# Altium PCB PCB1.PcbDoc
Units mm, origin at the board's own origin, x right, y up, seen from the top; angles counter-clockwise.
Board outline 91.01 x 104.94 mm, 2 copper layers (Top Layer, Bottom Layer); 47 components, 38 nets, 158 pads, 28 vias.
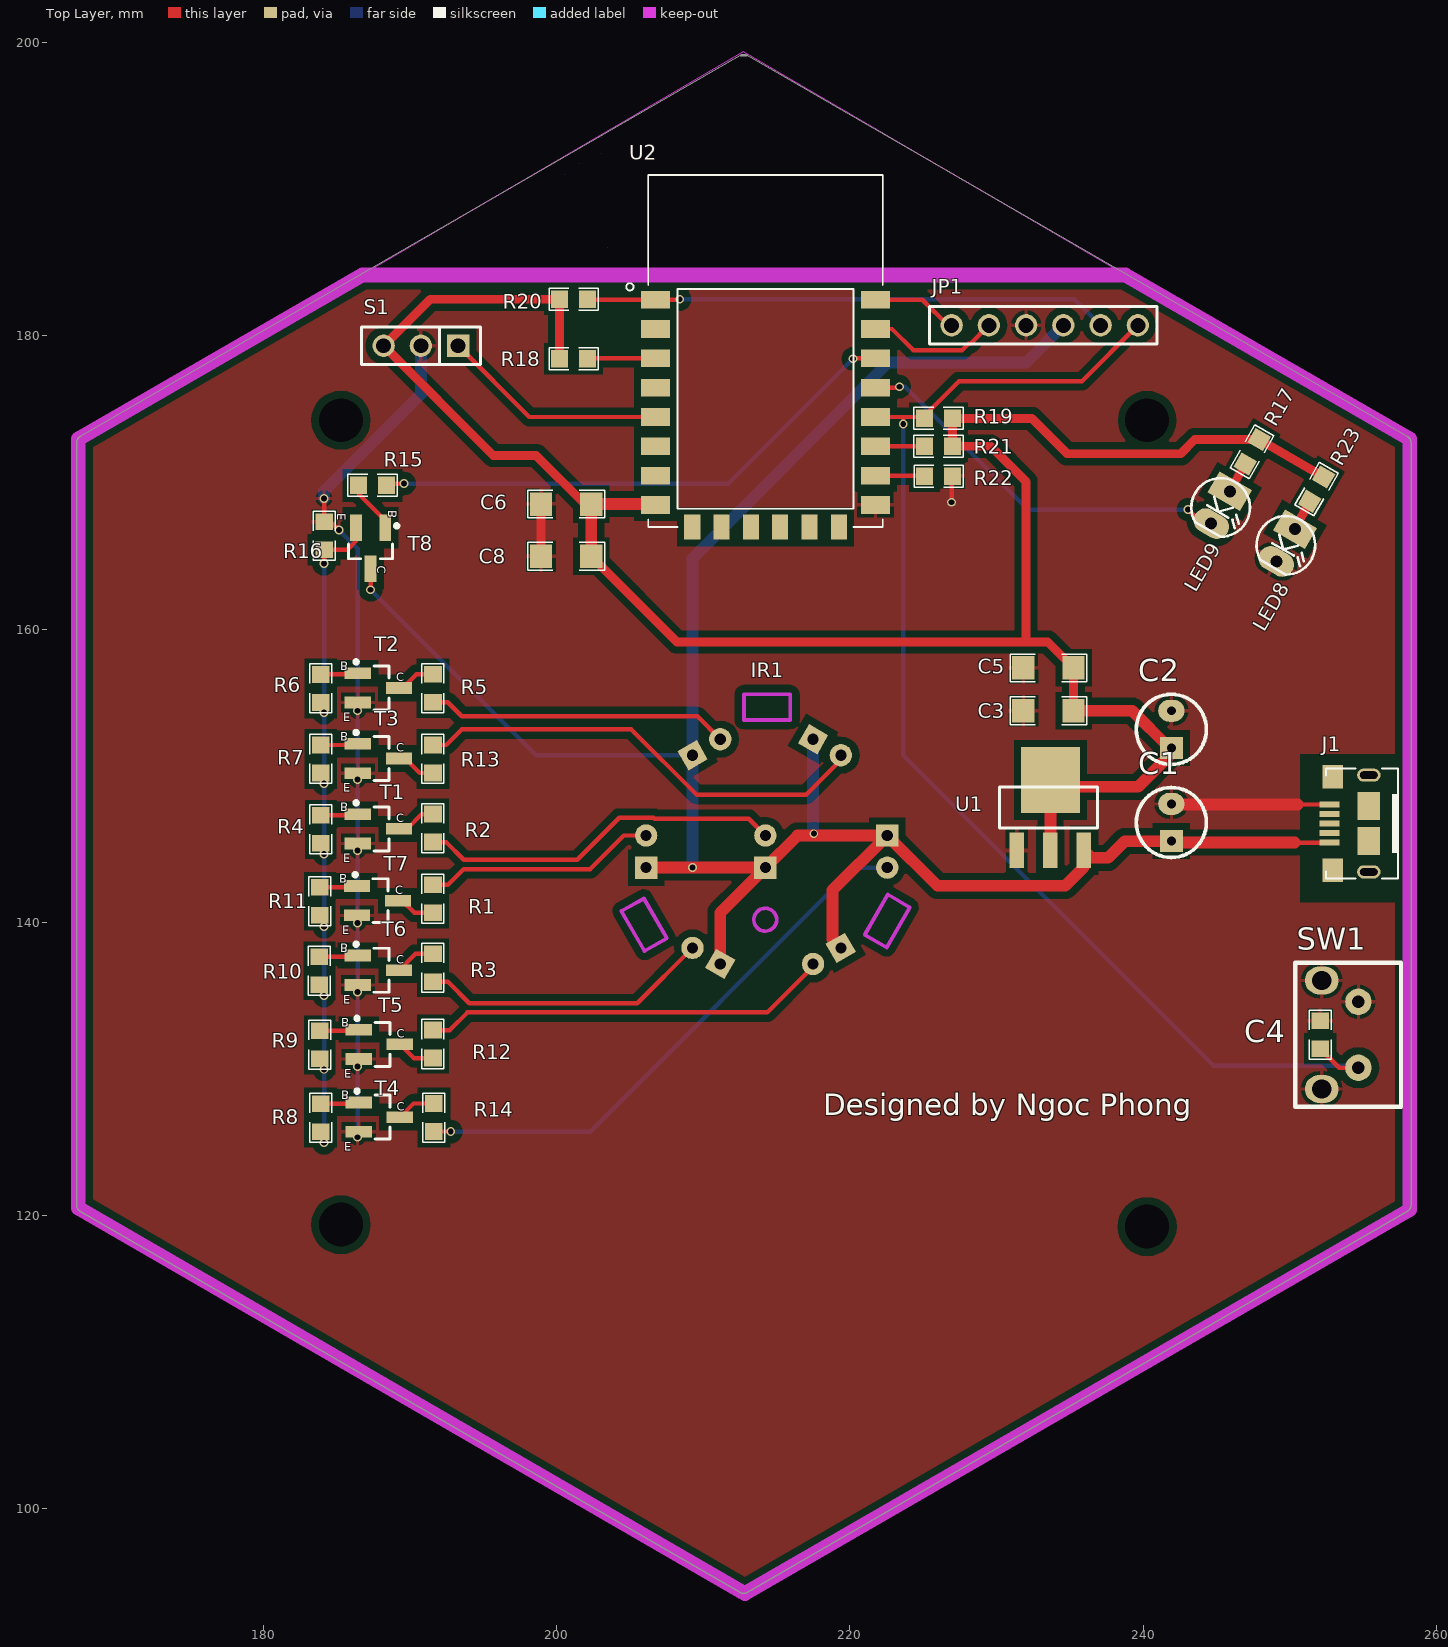
[diagram p0: Top Layer view]
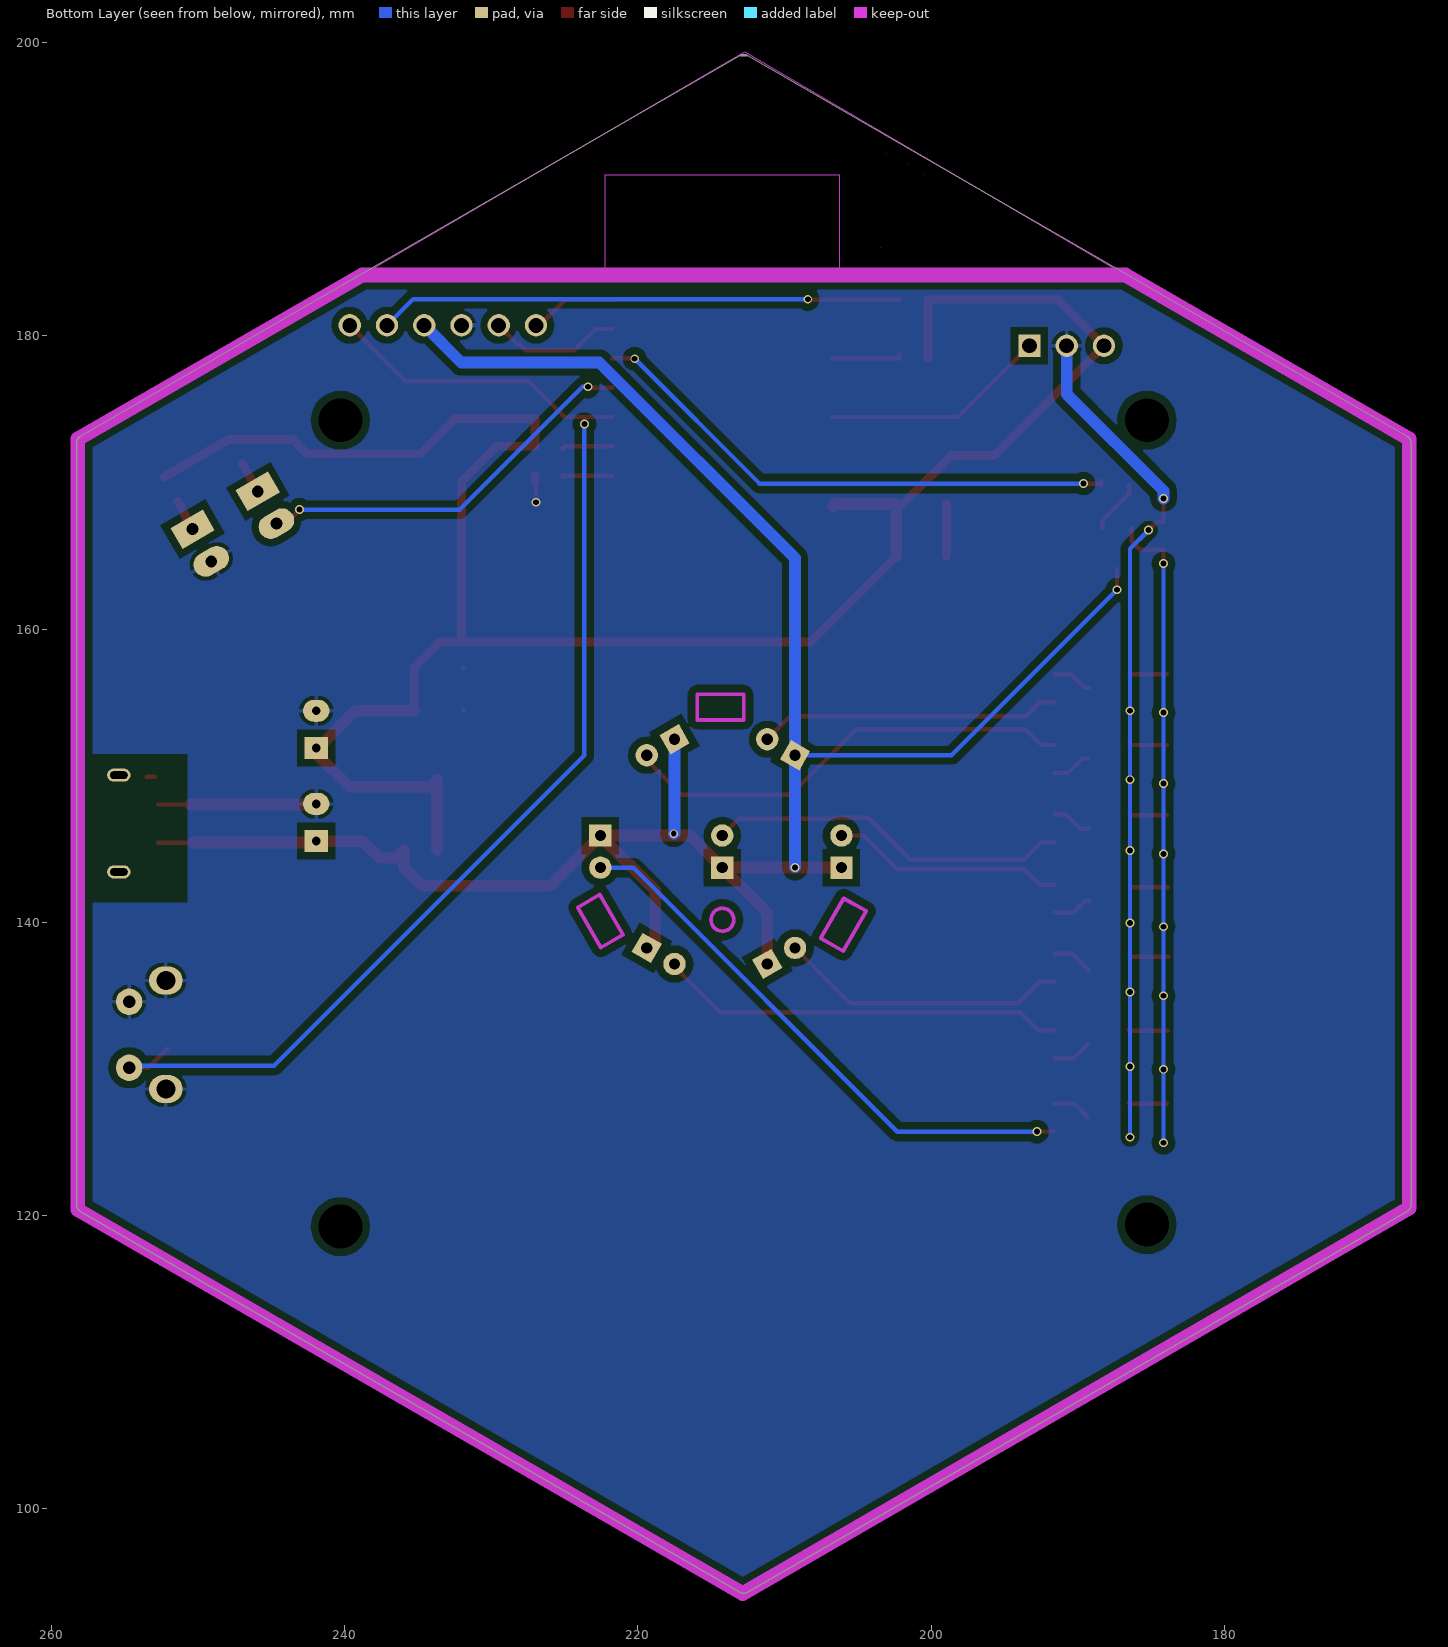
[diagram p1: Bottom Layer view, seen from below]
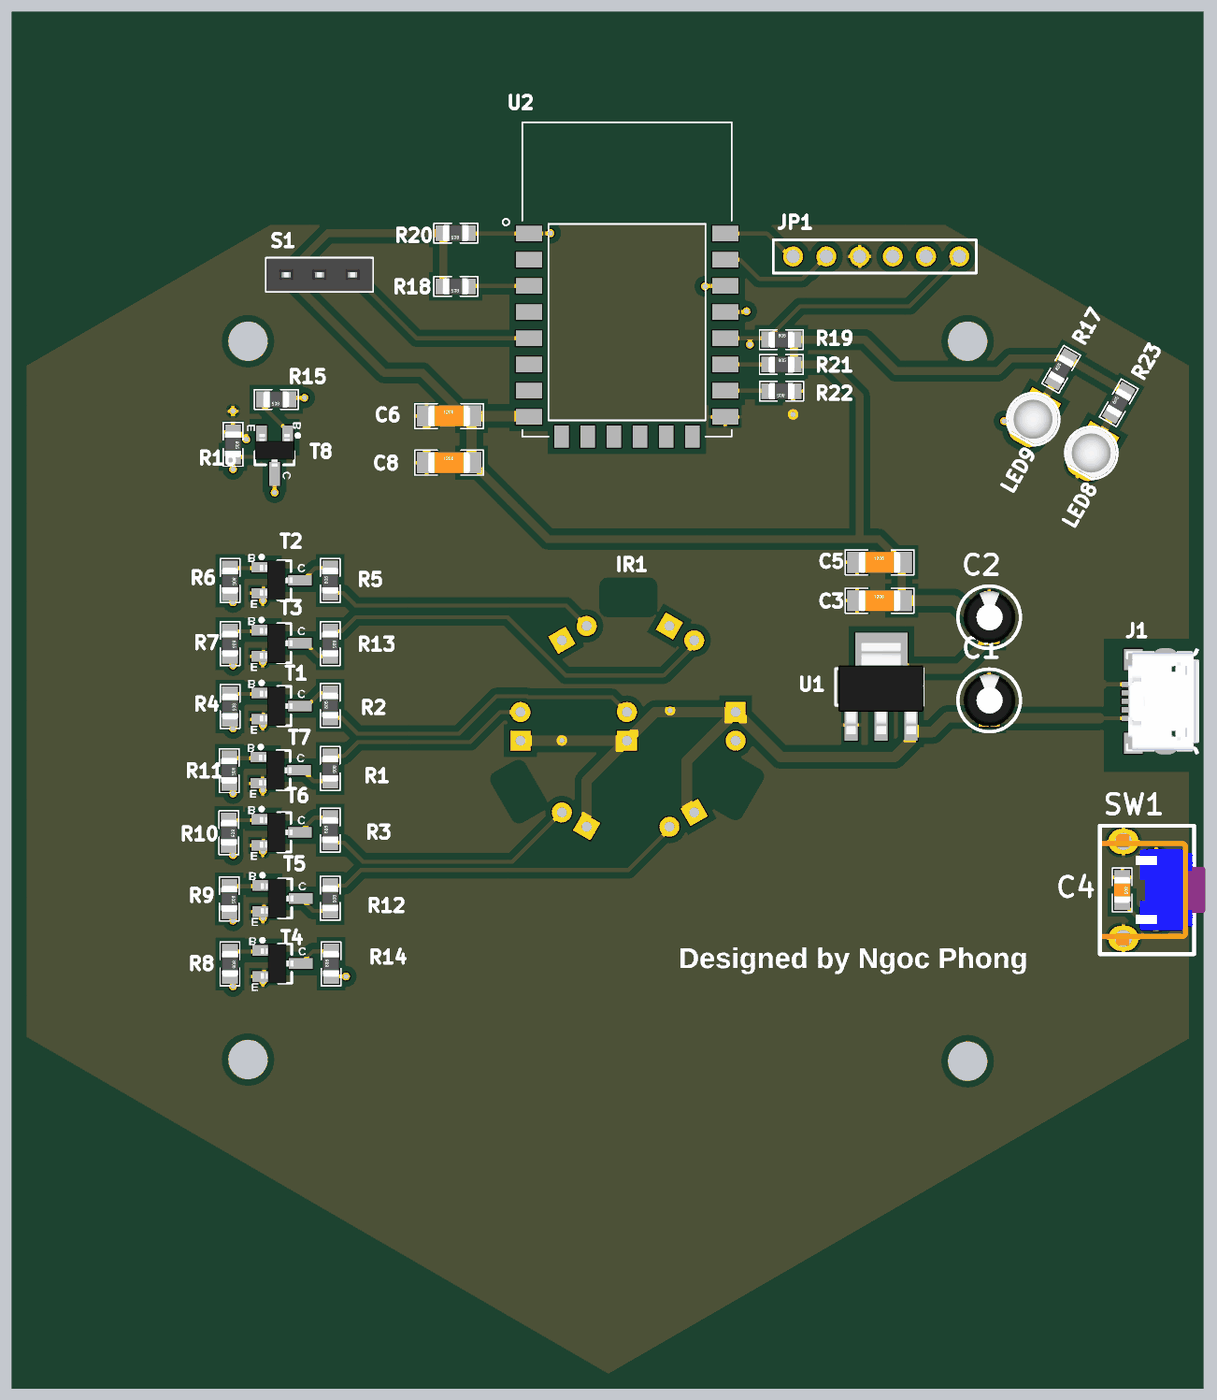
[diagram p2: 3D render of the assembled board from above, using the file's embedded part models]

## Layer stack, top to bottom
Top Solder: solder mask 0.0102, Solder Resist, Dk 3.5
Top Layer: signal copper 0.0356
Dielectric 1: dielectric 0.32, FR-4, Dk 4.8
Bottom Layer: signal copper 0.0356
Bottom Solder: solder mask 0.0102, Solder Resist, Dk 3.5

## Board outline
190.023,107.305 190.024,107.305 212.524,94.313 ccw(c212.775,94.746) 213.025,94.313 213.026,94.313 235.527,107.305 ccw(c235.278,107.738) 235.528,107.305 258.03,120.298 ccw(c257.78,120.731) 258.281,120.731 258.281,172.701 ccw(c257.78,172.701) 258.03,173.134 235.528,186.127 ccw(c235.278,185.693) 235.527,186.127 235.528,186.127 235.527,186.127 213.026,199.119 213.025,199.119 ccw(c212.775,198.686) 212.524,199.119 212.525,199.119 cw(c212.775,198.686) 213.026,199.119 212.524,199.119 190.024,186.127 ccw(c190.273,185.693) 190.023,186.127 167.52,173.134 ccw(c167.77,172.701) 167.27,172.701 167.27,120.731 ccw(c167.77,120.731) 167.52,120.298
cut-out: 186.748,184.15 238.802,184.15 212.725,199.39
cut-out: 203.073,193.548
cut-out: 201.549,191.77
cut-out: 200.533,191.008
cut-out: 203.073,192.405
cut-out: 203.454,186.055

## Design rules (kind name [scope] priority, off if disabled: settings)
Clearance [All] p1: gap=0.5 ignorepadtopadclearanceinfootprint=FALSE
PolygonConnect [All] p1: connectstyle=Relief reliefconductorwidth=0.254 reliefentries=4 polygonreliefangle="90 Angle" airgapwidth=0.254
RoutingVias [All] p1: holewidth=0.4 width=0.6 viastyle="Through Hole" minholewidth=0.4 minwidth=0.6 maxholewidth=0.4 maxwidth=0.6
SolderMaskExpansion [All] p1: expansion=0.102
Width [All] p1: maxlimit=0.8 minlimit=0.3 preferedwidth=0.6
30 further rules are at their usual default settings.

## Components (designator, comment, footprint, x,y, rotation, side; value= is the part's Value field where it differs from the comment)
C1 "100uF/25v" CA-ALU-2.54 241.935,146.812 r90 top value=104
C2 "100uF/25v" CA-ALU-2.54 241.935,153.162 r90 top value=104
C3 "103/1206" SM-Cap-1206 233.553,154.432 r0 top
C4 "104/0805" SM-CAP-0805 252.095,132.334 r270 top
C5 "106/1206" SM-Cap-1206 233.553,157.353 r0 top
C6 "104/1206" SM-Cap-1206 200.66,168.529 r0 top
C8 "106/1206" SM-Cap-1206 200.66,164.973 r0 top
IR1 "IR_HUNONIC" PCBComponent_1 240.329,136.804 r0 top
J1 "=value" "USB-Micro-B-RA-SMD-PiP - duplicate" 252.722,146.742 r180 top
JP1 "Programming UART 6Pin" "JP6 2.54 No3D" 226.949,180.721 r0 top
LED8 "LED_3mm" LED-3 249.73,165.716 r240 top
LED9 "LED_3mm" LED-3 245.285,168.291 r240 top
R1 "221/0805" SM-RES-0805 191.578,141.605 r270 top
R2 "221/0805" SM-RES-0805 191.578,146.431 r90 top
R3 "221/0805" SM-RES-0805 191.578,136.906 r90 top
R4 "471/0805" SM-RES-0805 183.92,146.343 r270 top
R5 "221/0805" SM-RES-0805 191.578,155.966 r90 top
R6 "471/0805" SM-RES-0805 183.92,155.956 r270 top
R7 "471/0805" SM-RES-0805 183.92,151.143 r270 top
R8 "471/0805" SM-RES-0805 183.915,126.683 r270 top
R9 "471/0805" SM-RES-0805 183.863,131.649 r270 top
R10 "471/0805" SM-RES-0805 183.831,136.704 r270 top
R11 "471/0805" SM-RES-0805 183.855,141.444 r270 top
R12 "221/0805" SM-RES-0805 191.578,131.699 r270 top
R13 "221/0805" SM-RES-0805 191.578,151.143 r270 top
R14 "221/0805" SM-RES-0805 191.64,126.693 r90 top
R15 "470/0805" SM-RES-0805 187.452,169.799 r180 top
R16 "10k/0805" SM-RES-0805 184.15,166.37 r270 top
R17 "10K/0805" SM-RES-0805 247.444,172.101 r60 top
R18 "10K/0805" SM-RES-0805 201.168,178.435 r180 top
R19 "10K/0805" SM-RES-0805 226.06,174.371 r0 top
R20 "10K/0805" SM-RES-0805 201.168,182.499 r180 top
R21 "10K/0805" SM-RES-0805 226.06,172.466 r0 top
R22 "10K/0805" SM-RES-0805 226.06,170.434 r180 top
R23 "=Value" SM-RES-0805 251.841,169.545 r60 top
S1 "IR" JP3-C1T 193.294,179.324 r180 top
SW1 "SW2" Button-inclined-2C 253.492,132.334 r90 top
T1 "C1815" "c1815 dan" 187.26,146.377 r0 top
T2 "C1815" "c1815 dan" 187.26,155.99 r0 top
T3 "C1815" "c1815 dan" 187.26,151.177 r0 top
T4 "C1815" "c1815 dan" 187.322,126.717 r0 top
T5 "C1815" "c1815 dan" 187.322,131.683 r0 top
T6 "C1815" "c1815 dan" 187.26,136.737 r0 top
T7 "C1815" "c1815 dan" 187.195,141.478 r0 top
T8 "C1815" "c1815 dan" 187.325,166.116 r270 top
U1 "AMS1117-5V/3.3V" SOT-223 233.68,147.32 r0 top
U2 "ESP8266-12E/ESP-12E" XCVR_ESP8266-12E/ESP-12E 214.256,175.467 r0 top

## Footprints (in the part's own frame and the unit in brackets; to place one, negate y for a bottom-side part, rotate by r counter-clockwise, add the part's x,y. Pads: shape width x height; smd on the part's side, far side on the other; paste and mask are expansions set on the pad)
Button-inclined-2C [mm]
  oval 1.9x2.3 hole 1.3: 0(-3.7,1.3) 0(3.7,1.3)
  round 1.8 hole 0.85: 1(2.25,-1.2) 2(-2.25,-1.2)
  silkscreen extent -4.9,-4.1 4.9,3.1, body extent -4.25,-4.95 4.25,2.95, height 7.4
"c1815 dan" [mm] "SOT23, 3-Leads, Body 3.0x2.6mm (max), Pitch 0.95mm, IPC Medium Density (SOT95P245X110-3N)"
  rect 1.8x0.8 smd: 1(-0.8,-1) 2(2,0) 3(-0.8,1)
  silkscreen extent -1.05,-1.5 1.32,1.9, body extent -1.05,-1.5 1.45,1.5, height 1.06
CA-ALU-2.54 [mm]
  rect 1.5x1.58 hole 0.6: 1(-1.27,0)
  oval 1.5x1.8 hole 0.6: 2(1.27,0)
  silkscreen extent -2.39,-2.39 2.39,2.39, body extent -2,-2.03 1.99,1.97, height 7.01
JP3-C1T [mm] "3 row, straight, gold plating"
  rect 1.52x1.52 hole 1.02: 1(0,0)
  round 1.52 hole 1.02: 2(2.54,0) 3(5.08,0)
  silkscreen extent -1.52,-1.27 6.6,1.27, body extent -1.52,-1.25 6.6,1.25, height 8.51
"JP6 2.54 No3D" [mm]
  round 1.52 hole 1.02: 1(0,0) 2(2.54,0) 3(5.08,0) 4(7.62,0) 5(10.16,0) 6(12.7,0)
  silkscreen extent -1.52,-1.27 14,1.27
LED-3 [mil] "LED 2 PIN, 3ly Only colour"
  rect 65x100 hole 32: 1(-50,0)
  oval 65x100 hole 32: 2(50,0)
  silkscreen extent -79,-78 68,79, body extent -75,-75 63,75, height 217
PCBComponent_1 [mil]
  rect 60x60 hole 30: 1(-1026.77,272.88) 7(-699.72,359.01) 13(-1346.94,272.89)
  round 60 hole 30: 2(-1026.77,359.02) 4(-1147.83,617.74) 6(-824.22,574.67) 8(-699.72,272.87) 10(-898.83,14.15) 12(-1222.44,57.23) 14(-1346.94,359.03)
  rect 60x60 hole 30 rot 30: 3(-1222.42,574.68) 9(-824.23,57.22)
  rect 60x60 hole 30 rot 150: 5(-898.81,617.74) 11(-1147.84,14.16)
  Keep-Out Layer circle w10: c-1027.26,132.96 r30.61
  Keep-Out Layer lines w10: -1413.67,156.57 -1352.67,189.61 -1291.42,83.52 ; -1413.67,156.57 -1353.27,190.65 -1291.42,83.52 ; -1413.67,156.57 -1351.48,48.85 ; -1413.67,156.57 -1351.48,48.85 ; -1351.48,48.85 -1291.42,83.52 ; -1351.48,48.85 -1291.42,83.52 ; -1084.48,669.01 -960.78,669.01 -960.09,669.7 -960.09,718.99 -960.09,738.36 -1084.48,738.36 -1084.48,669.01 ; -760.26,92.72 -700.97,58.49 -639.12,165.62 -698.07,200.43 -760.26,92.72
  body extent -812,-176 -812,-176, height 10
SM-CAP-0805 [mm]
  rect 1.14x1.2 smd: 1(-0.955,0) 2(0.955,0)
  silkscreen extent -1.68,-0.75 1.67,0.75, body extent -1,-0.62 1,0.63, height 0.8
SM-Cap-1206 [mm]
  rect 1.52x1.6 smd: 1(-1.71,0) 2(1.71,0)
  silkscreen extent -2.62,-0.95 2.62,0.95, body extent -1.6,-0.8 1.6,0.8, height 1.02
SM-RES-0805 [mm]
  rect 1.14x1.2 smd: 1(-0.955,0) 2(0.955,0)
  silkscreen extent -1.68,-0.75 1.67,0.75, body extent -1,-0.62 1,0.63, height 0.8
SOT-223 [mm] "SOT-223"
  rect 1x2.4 smd: 1(-2.286,-2.4) 2(0,-2.4) 3(2.286,-2.4)
  rect 4x4.5 smd: 4(0.014,2.4)
  silkscreen extent -3.48,-0.88 3.22,1.92, body extent -3.25,-3.09 3.25,3.87, height 1.66
"USB-Micro-B-RA-SMD-PiP - duplicate" [mm]
  rect 1.35x0.4 smd: 1(0,1.3) 2(0,0.65) 3(0,0) 4(0,-0.65) 5(0,-1.3)
  oval 1.6x0.9 hole 0.5 slot 1.2 at 0 deg: 6(-2.675,3.3) 6(-2.675,-3.3)
  oval 2x1.5 on Top Paste: 6(-2.675,3.3) 6(-2.675,-3.3)
  rect 1.55x1.9 smd: 6(-2.675,-1.2) 6(-2.675,1.2)
  rect 1.4x1.6 smd: 6(-0.225,3.2) 6(-0.225,-3.2)
  silkscreen extent -4.75,-3.75 0.25,3.75, body extent -5.28,-4.1 0.15,4.1, height 2.72
XCVR_ESP8266-12E/ESP-12E [mm]
  rect 2x1.2 smd: 1(-7.5,7) 2(-7.5,5) 3(-7.5,3) 4(-7.5,1) 5(-7.5,-1) 6(-7.5,-3) 7(-7.5,-5) 8(-7.5,-7) 15(7.5,-7) 16(7.5,-5) 17(7.5,-3) 18(7.5,-1) 19(7.5,1) 20(7.5,3) 21(7.5,5) 22(7.5,7)
  rect 1.1x1.7 smd: 9(-5,-8.5) 10(-3,-8.5) 11(-1,-8.5) 12(1,-8.5) 13(3,-8.5) 14(5,-8.5)
  Keep-Out Layer region: 8,8.51 -8.009,8.51 -8.009,15.5 8,15.5
  Keep-Out Layer region: 8,8.51 -8.009,8.51 -8.009,15.5 8,15.5
  silkscreen extent -9.5,-8.5 8,15.5

## Part data
C1 C2: library part CN-ALU-DIP, "Capacitor (Semiconductor SIM Model)", LatestRevisionDate=17-Jul-2002, LatestRevisionNote="Re-released for DXP Platform.", PackageReference=C1206, Publisher="Altium Limited"
C3 C4 C5 C6 C8: library part "Capacitor SMD", "Capacitor SMD 0402 - 1206"
J1: library part MiniUSB-AB-SMT, "MicroUSB-B-SMT"
JP1: "Programming SWD"
R1 R2 R3 R4 R5 R6 R7 R8 R9 R10 R11 R12 R13 R14 R15 R16 R17 R18 R19 R20 R21 R22 R23: library part "Resistor SMD", "Res SMD"
S1: "VISHAY SEMICONDUCTOR   TSOP31238   IR RECEIVER, 40M, 38KHZ, SIP"
SW1: "SW"
T1 T2 T3 T4 T5 T6 T7 T8: "C1815 dan"
U1: library part AMS1117, "IC on ap 5V/3.3V", ComponentLink1Description=Datasheet, ComponentLink1URL=http://www.ti.com/lit/ds/symlink/lm1117.pdf
U2: "This WiFi module has a 32-bit MCU micro and clock speeds supporting 80 MHz or 160 MHz. Supports the RTOS and integrated Wi-Fi MAC/BB/RF/PA/LNA, and has an on-board antenna.", Package=None, Availability=Unavailable, MF=AI-Thinker, MP=ESP8266-12E/ESP-12E, Price=None, SnapEDA_Link=https://www.snapeda.com/parts/ESP8266-12E/ESP-12E/AI-Thinker/view-part/106414/?ref=snap

## Free pads (board coordinates)
  oval 1.651x2.54 hole 3: 1(185.293,119.38) 1(185.293,174.244) 1(240.284,119.253) 1(240.284,174.244)

## Via types
v1: diameter 0.6, hole 0.4, Top Layer to Bottom Layer, 28 vias

## Nets (pads, with @x,y where several pads share a name; then routed paths per layer and width w, separated by ;. In a path a pad name is that pad's centre, name@x,y a point inside that pad or via, vN(x,y) a via of type N, cw(c..) or ccw(c..) an arc to the next point about the centre after c; other vN are vias at no path point)
3.3v: C2.1 C3.2 C5.2 C6.2 C8.2 R17.2 R18.2 R19.2 R20.2 R21.2 R23.2 S1.3 U1.2 U1.4 U2.8 | length 151.5
  Top Layer w0.6: R18.2 R20.2 191.389,182.499 S1.3 195.707,171.831 198.628,171.831 201.93,168.529 C6.2 ; C8.2 208.212,159.131 232.029,159.131 ; U2.8@206.691,168.402 U2.8 ; C3.2 C5.2 233.485,159.131 232.029,159.131 ; R23.2 R17.2 243.54,172.928 242.57,171.958 234.823,171.958 232.41,174.371 R19.2 R21.2 229.616,172.466 232.029,170.053 232.029,159.131
  Top Layer w0.8: C8.2 C6.2 206.564,168.529 U2.8@206.691,168.402 ; U1.2 233.694,144.934 U1.4 234.173,149.241 239.665,149.241 241.935,151.511 C2.1 241.808,151.892 239.268,154.432 C3.2
5V: C1.1 IR1.1 IR1.3 IR1.5 IR1.7 IR1.9 IR1.11 IR1.13 J1.1 JP1.4 T8.2 U1.3 | length 156.2
  Top Layer w0.3: v1@187.325,162.56 v1(187.325,162.687) T8.2 ; 250.344,145.442 J1.1
  Top Layer w0.8: IR1.13 IR1.1 ; IR1.11 211.174,140.66 IR1.1 ; IR1.9 218.821,138.83 218.821,142.187 IR1.7 ; 250.344,145.442 242.035,145.442 C1.1 238.76,145.542 237.617,144.399 236.487,144.399 U1.3 235.966,143.764 234.696,142.494 225.985,142.494 IR1.7 ; IR1.1 216.437,145.923 IR1.7
  Bottom Layer w0.3: v1(187.325,162.687) 198.611,151.401 IR1.3
  Bottom Layer w0.8: v1(209.279,143.752) IR1.3 209.279,164.829 222.631,178.181 232.029,178.181 JP1.4 ; IR1.5 217.499,146.102 v1(217.551,146.05)
EN: R18.1 U2.3 | length 4.7
  Top Layer w0.3: R18.1 202.155,178.467 U2.3 ; R18.1@202.139,178.699 R18.1@202.187,178.651
GND: C1.2 C2.2 C3.1 C4.1 C5.1 C6.1 C8.1 J1.5 JP1.3 LED8.2 R16.1 R22.1 S1.2 SW1.0 SW1.1 T1.1 T2.1 T3.1 T4.1 T5.1 T6.1 T7.1 U1.1 U2.15 | length 74.6
  Top Layer w0.3: v1(184.15,168.91) R16.1 184.592,167.325 v1(185.166,166.751) ; v1(226.949,168.656) 226.949,170.368 R22.1 ; C3.1 C3.1@231.902,154.491 ; C5.1 C5.1@231.902,157.294 ; 250.531,148.042 J1.5
  Top Layer w0.6: C8.1 C6.1 ; R22.1@227.015,170.119 R22.1
  Top Layer w0.8: C1.2 241.975,148.042 250.531,148.042
  Bottom Layer w0.3: v1(185.166,166.751) 186.436,165.481 v1(186.436,154.432) v1(186.436,149.733) v1(186.436,144.907) v1(186.436,139.954) v1(186.436,135.255) v1(186.436,130.175) v1(186.436,125.349)
  Bottom Layer w0.8: v1(184.15,168.91) 184.15,169.418 190.754,176.022 S1.2
GPIO0: C4.2 JP1.6 R19.1 SW1.2 U2.18 | length 86.6
  Top Layer w0.3: U2.18 223.647,174.467 ; v1(223.647,173.99) 223.647,174.467 ; JP1.6 235.839,176.911 227.453,176.911 225.009,174.467 223.647,174.467 ; C4.2 253.39,130.084 SW1.2
  Bottom Layer w0.3: v1(223.647,173.99) 223.647,151.384 244.797,130.234 254.542,130.234 SW1.2
GPIO2: R21.1 U2.17 | length 3.4
  Top Layer w0.3: U2.17 224.977,172.467 R21.1@225.057,172.387
  Top Layer w0.4: R21.1@225.057,172.387 R21.1@225.105,172.339
GPIO15: R22.2 U2.16 | length 3.4
  Top Layer w0.3: U2.16 224.978,170.467 R22.2@225.058,170.387
  Top Layer w0.4: R22.2@225.058,170.387 R22.2
IR: R4.2 R6.2 R7.2 R8.2 R9.2 R10.2 R11.2 R16.2 T8.1 | length 43.8
  Top Layer w0.3: v1(184.15,164.465) R16.2 185.735,165.415 186.325,166.005 T8.1
  Bottom Layer w0.3: v1(184.15,124.968) v1(184.15,129.979) v1(184.15,135.001) v1(184.15,139.7) v1(184.15,144.673) v1(184.15,149.473) v1(184.15,154.305) v1(184.15,164.465)
LEARN_IR: S1.1 U2.5 | length 15.5
  Top Layer w0.3: S1.1 198.151,174.467 U2.5
LED: LED9.2 U2.19 | length 26.8
  Top Layer w0.3: U2.19 223.33,176.467 v1(223.393,176.53) ; v1(243.078,168.148) 244.035,167.191 LED9.2
  Bottom Layer w0.3: v1(223.393,176.53) 223.774,176.53 232.156,168.148 v1(243.078,168.148)
LED1: R2.2 T1.2 | length 2.7
  Top Layer w0.3: T1.2 189.811,146.377 190.82,147.386 R2.2
LED2: R5.2 T2.2 | length 2.7
  Top Layer w0.3: T2.2 189.518,155.99 190.449,156.921 R5.2
LED3: R13.2 T3.2 | length 2.7
  Top Layer w0.3: T3.2 189.691,151.177 190.68,150.188 R13.2
LED4: R14.2 T4.2 | length 2.7
  Top Layer w0.3: T4.2 190.253,127.648 R14.2
LED5: R12.2 T5.2 | length 2.6
  Top Layer w0.3: T5.2 190.261,130.744 R12.2
LED6: R3.2 T6.2 | length 2.8
  Top Layer w0.3: T6.2 190.384,137.861 R3.2
LED7: R1.2 T7.2 | length 2.7
  Top Layer w0.3: T7.2 189.484,141.478 190.312,140.65 R1.2
LED_IR: R15.1 U2.20 | length 37.3
  Top Layer w0.3: R15.1@188.407,170.119 R15.1 188.534,169.926 v1(189.611,169.926) ; v1(220.218,178.435) 220.25,178.467 U2.20
  Bottom Layer w0.3: v1(189.611,169.926) 211.709,169.926 v1(220.218,178.435)
NetIR1_2: IR1.2 R2.1 | length 24.9
  Top Layer w0.3: R2.1 192.471,145.476 193.675,144.272 201.422,144.272 204.285,147.135 206.619,147.135 206.688,147.066 213.106,147.066 IR1.2
NetIR1_4: IR1.4 R5.1 | length 20.6
  Top Layer w0.3: R5.1 192.588,155.011 193.548,154.051 209.618,154.051 IR1.4
NetIR1_6: IR1.6 R13.1 | length 31.4
  Top Layer w0.3: R13.1 192.484,152.098 193.548,153.162 205.105,153.162 209.55,148.717 217.043,148.717 219.394,151.068 IR1.6
NetIR1_8: IR1.8 R14.1 | length 38.4
  Top Layer w0.3: R14.1 192.778,125.738 v1(192.786,125.73)
  Bottom Layer w0.3: v1(192.786,125.73) 202.311,125.73 220.316,143.735 IR1.8
NetIR1_10: IR1.10 R12.1 | length 27.9
  Top Layer w0.3: R12.1 192.725,132.654 193.929,133.858 214.376,133.858 217.499,136.981 IR1.10
NetIR1_12: IR1.12 R3.1 | length 19.9
  Top Layer w0.3: R3.1 192.598,135.951 194.056,134.493 205.515,134.493 IR1.12
NetIR1_14: IR1.14 R1.1 | length 15.9
  Top Layer w0.3: R1.1 192.598,142.56 193.675,143.637 202.311,143.637 204.597,145.923 IR1.14
NetLED8_1: LED8.1 R23.1 | length 2.1
  Top Layer w0.6: LED8.1 R23.1
NetLED9_1: LED9.1 R17.1 | length 2.2
  Top Layer w0.6: LED9.1 R17.1
NetR4_1: R4.1 T1.3 | length 2.6
  Top Layer w0.3: R4.1 186.381,147.298 T1.3
NetR6_1: R6.1 T2.3 | length 2.6
  Top Layer w0.3: R6.1 186.381,156.911 T2.3
NetR7_1: R7.1 T3.3 | length 2.6
  Top Layer w0.3: R7.1 186.381,152.098 T3.3
NetR8_1: R8.1 T4.3 | length 2.6
  Top Layer w0.3: R8.1 186.443,127.638 T4.3
NetR9_1: R9.1 T5.3 | length 2.7
  Top Layer w0.3: R9.1 186.443,132.604 T5.3
NetR10_1: R10.1 T6.3 | length 2.7
  Top Layer w0.3: R10.1 186.381,137.659 T6.3
NetR11_1: R11.1 T7.3 | length 2.6
  Top Layer w0.3: R11.1 186.316,142.399 T7.3
NetR15_2: R15.2 T8.3 | length 3.7
  Top Layer w0.3: R15.2@186.563,169.733 R15.2 186.497,169.23 188.325,167.402 T8.3
RST: JP1.5 R20.1 U2.1 | length 35.7
  Top Layer w0.3: R20.1 202.155,182.467 U2.1 208.375,182.467 v1(208.407,182.499)
  Bottom Layer w0.3: v1(208.407,182.499) 235.331,182.499 JP1.5
RX: JP1.2 U2.21 | length 9
  Top Layer w0.3: U2.21 222.885,180.467 224.341,179.011 227.657,179.011 228.097,179.451 228.219,179.451 JP1.2
TX: JP1.1 U2.22 | length 5.9
  Top Layer w0.3: U2.22 224.953,182.467 226.699,180.721 JP1.1
pads on no net: J1.2 J1.3 J1.4 J1.6 U2.2 U2.4 U2.6 U2.7 U2.9 U2.10 U2.11 U2.12 U2.13 U2.14
copper on no net: | length 0.5
  Top Layer w0.3: 252.947,149.942 253.492,149.942

## Polygon pours and split planes (outlines as drawn)
GND on Top Layer "GND_L01_P032" (solid, remove dead copper, pour order 32): 167.386,172.974 186.748,184.15 238.802,184.15 258.064,173.047 258.191,120.396 212.852,94.234 167.386,120.904 167.64,173.121
no net on Top Layer "Top Layer-No Net" (solid, pour order 2): 167.386,172.974
GND on Bottom Layer "GND_L02_P030" (solid, pour order 30): 167.386,172.974 186.748,184.15 238.802,184.15 258.191,172.974 258.191,120.396 212.852,94.234 167.386,120.523
no net on Bottom Layer "NONET_L02_P028" (solid, pour order 28): 167.64,172.974
no net on Bottom Layer "NONET_L02_P006" (solid, pour order 6): 167.386,173.355

## Keep-outs
Keep-Out Layer:
  lines w0.254: 212.598,94.361 212.852,94.234
  lines w1: 212.598,94.361 167.386,120.523 167.386,172.974 186.748,184.15 238.802,184.15 258.191,172.974 258.191,120.396 212.852,94.234

## Other copper
Top Layer:
  pour cut-out: 258.191,151.511 250.698,151.511 250.698,141.351 258.191,141.351
  pour cut-out: 203.2,192.659
Bottom Layer:
  pour cut-out: 258.191,151.511 250.698,151.511 250.698,141.351 258.191,141.351

## Silkscreen, mask and mechanical layers (free items; w line width, h text height)
Top Overlay:
  text "Designed by Ngoc Phong" at 218.186,126.365 h2.5

## Text inside footprints (layer, text, board x,y; h text height)
T1: Top Overlay "B" at 185.26,148.377 h1 r180; Top Overlay "E" at 185.46,144.877 h1 r180; Top Overlay "C" at 189.06,147.609 h1 r180
T2: Top Overlay "B" at 185.26,157.99 h1 r180; Top Overlay "E" at 185.46,154.49 h1 r180; Top Overlay "C" at 189.06,157.223 h1 r180
T3: Top Overlay "B" at 185.26,153.177 h1 r180; Top Overlay "E" at 185.46,149.677 h1 r180; Top Overlay "C" at 189.06,152.409 h1 r180
T4: Top Overlay "B" at 185.322,128.717 h1 r180; Top Overlay "E" at 185.522,125.217 h1 r180; Top Overlay "C" at 189.122,127.949 h1 r180
T5: Top Overlay "C" at 189.122,132.915 h1 r180; Top Overlay "E" at 185.522,130.183 h1 r180; Top Overlay "B" at 185.322,133.683 h1 r180
T6: Top Overlay "B" at 185.26,138.737 h1 r180; Top Overlay "E" at 185.46,135.237 h1 r180; Top Overlay "C" at 189.06,137.97 h1 r180
T7: Top Overlay "C" at 188.995,142.71 h1 r180; Top Overlay "E" at 185.395,139.978 h1 r180; Top Overlay "B" at 185.195,143.478 h1 r180
T8: Top Overlay "C" at 188.557,164.316 h1 r90; Top Overlay "E" at 185.825,167.916 h1 r90; Top Overlay "B" at 189.325,168.116 h1 r90